# Altium PCB AcutuatorPCB.PcbDoc (part 2 of 2)
Units mm, origin at the board's own origin, x right, y up, seen from the top; angles counter-clockwise.
Board outline 80 x 80 mm, 2 copper layers (Top Layer, Bottom Layer), stack 1.57 mm thick; 63 components, 62 nets, 262 pads, 76 vias.
Unrouted connection lines stored in the file: 57.
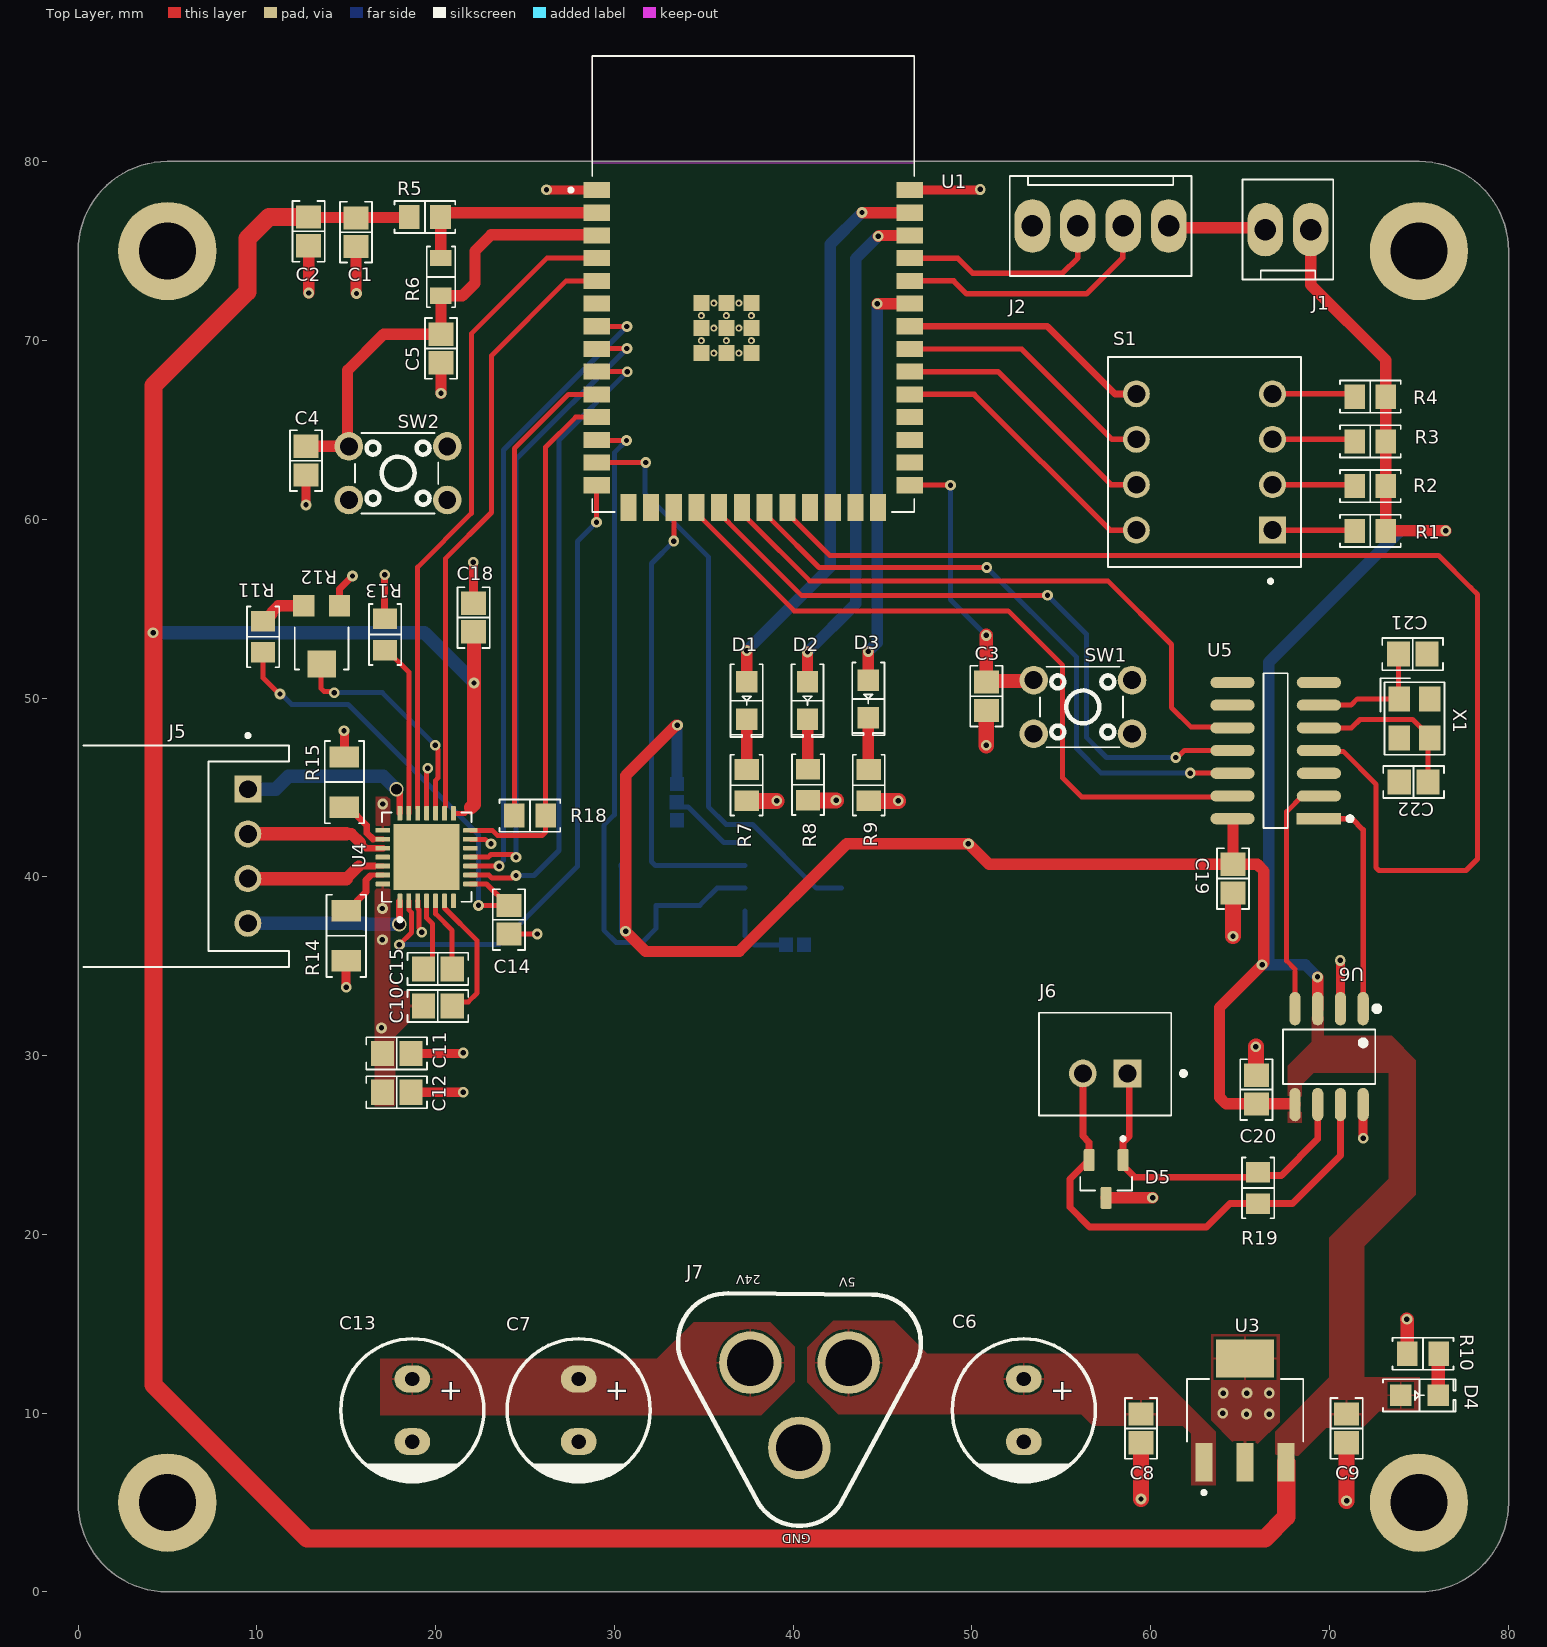
[diagram p0: Top Layer view]

## Via types
v1: diameter 0.6, hole 0.3, Top Layer to Bottom Layer, 74 vias
v2: diameter 0.8, hole 0.6, Top Layer to Bottom Layer, 2 vias

## Nets (pads, with @x,y where several pads share a name; then routed paths per layer and width w, separated by ;. In a path a pad name is that pad's centre, name@x,y a point inside that pad or via, vN(x,y) a via of type N, cw(c..) or ccw(c..) an arc to the next point about the centre after c; other vN are vias at no path point) (continued)
CAN_MOSI: (continued)
  Top Layer w0.279: U1.19 35.86,60.35 36.372,59.838 36.372,59.831 40.478,55.725 54.2,55.725 v1(54.225,55.75) ; v1(61.4,46.675) 61.487,46.675 61.872,47.06 U5.11
  Bottom Layer w0.279: v1(54.225,55.75) 56.397,53.578 56.397,47.803 57.525,46.675 v1(61.4,46.675)
CAN_SCK: U1.20 U5.10 | length 34.8
  Top Layer w0.279: U1.20 37.13,60.35 37.642,59.838 37.642,59.831 40.923,56.55 57.6,56.55 61.161,52.989 61.161,49.464 62.257,48.368 64.529,48.368 U5.10
CANH: D5.2 J6.2 R19.2 U6.7 | length 28.2
  Top Layer w0.381: J6.2 56.2,25.5 56.55,25.15 D5.2 55.482,23.092 55.482,21.518 56.582,20.418 63.118,20.418 64.425,21.725 R19.2 67.925,21.725 70.607,24.407 U6.7
CANL: D5.1 J6.1 R19.1 U6.6 | length 19.1
  Top Layer w0.381: D5.1@58.45,23.845 59.095,23.2 65.725,23.2 R19.1 66.175,23.3 67.3,23.3 69.337,25.337 U6.6 ; D5.1 58.45,25.15 58.8,25.5 58.8,28.9 J6.1
CHIP_PU: C4.2 C5.2 R6.1 SW2.4 U1.3 | length 26.1
  Top Layer w0.635: C4.2 SW2.4 15.075,64.15 15.075,68.325 17.1,70.35 C5.2 R6.1 21.5,72.5 22.2,73.2 22.2,75 23.1,75.9 28.985,75.9 U1.3
DIP_SW1: S1.1B U1.31 | length 15.8
  Top Layer w0.305: U1.31 50.12,66.98 57.71,59.39 S1.1B
DIP_SW2: S1.2B U1.32 | length 15.3
  Top Layer w0.305: U1.32 51.45,68.25 57.77,61.93 S1.2B
DIP_SW3: S1.3B U1.33 | length 14.8
  Top Layer w0.305: U1.33 52.78,69.52 57.83,64.47 S1.3B
DIP_SW4: S1.4B U1.34 | length 14.2
  Top Layer w0.381: U1.34 54.21,70.79 57.99,67.01 S1.4B
E_DIR: IC1.8 J4.3 | length 4.7
  Bottom Layer w0.279: J4.3 33.767,43.908 34.128,43.908 36.131,41.905 IC1.8
ESP_3V3: R5.1 R6.2 U1.2 | length 11.1
  Top Layer w0.635: R6.2 20.288,74.612 20.288,76.887 R5.1 20.515,77.14 U1.2
GND: C1.1 C2.1 C3.1 C4.1 C5.1 C6.2 C7.2 C8.1 C9.1 C11.1 C12.1 C13.2 C14.2 C16.1 C17.1 C18.1 C19.1 C20.1 C21.1 C22.1 D5.3 IC1.4 J2.4 J3.2 J4.2 J7.2 R7.1 R8.1 R9.1 R10.1 R12.1 R13.1 R14.1 R15.1 SW1.1 SW2.1 U1.1 U1.40 U1.41_1 U1.41_2 U1.41_3 U1.41_4 U1.41_5 U1.41_6 U1.41_7 U1.41_8 U1.41_9 U3.2 U3.4 U4.3 U4.13 U4.18 U4.29 U5.7 U6.2 U6.8 X1.2 X1.4 | length 64.7
  Top Layer w0.279: U4.3 19.005,38.645 19.005,38.227 19.071,38.161 19.071,37.141 19.225,36.987 v1(19.225,36.9) ; U4.18 19.505,43.555 19.505,46.018 v1(19.562,46.075) ; U4.13 22.774,42.1 23.024,41.85 v1(23.1,41.85) ; C14.2 24.105,36.805 v1(25.689,36.805)
  Top Layer w0.381: R12.1 14.625,56.1 v1(15.35,56.825) ; v1(17.15,56.9) 17.15,54.45 R13.1
  Top Layer w0.508: v1(12.75,60.8) C4.1 ; v1(14.875,48.175) 14.9,48.175 R15.1 ; v1(15,33.825) R14.1 ; C12.1 v1(21.55,27.95) ; C11.1 21.55,30.125 v1(21.55,30.15) ; v1(22.1,57.6) 22.113,57.587 22.113,55.312 C18.1 ; v1(26.2,78.425) 26.208,78.417 29.008,78.417 U1.1 ; U1.40 50.401,78.41 50.437,78.446 v1(50.462,78.446) ; v1(70.6,35.325) 70.607,35.325 U6.2 ; v1(71.875,25.375) 71.877,25.375 U6.8
  Top Layer w0.635: v1(12.9,72.65) C2.1 ; C1.1 15.55,72.65 v1(15.575,72.625) ; v1(20.3,67.05) C5.1 ; D5.3@57.51,22.05 v1(60.1,22.05)
  Top Layer w0.762: v1(74.325,15.25) 74.35,15.225 R10.1
  Top Layer w0.889: R7.1 v1(39.075,44.25) ; R8.1 v1(42.4,44.275) ; R9.1 v1(45.875,44.25) ; v1(50.8,47.35) C3.1 ; v1(59.45,5.2) C8.1 ; v1(64.6,36.675) C19.1 ; v1(65.875,30.5) 65.875,28.9 C20.1 ; v1(70.95,5.1) C9.1
  other v1: 65.35,9.95 66.625,9.95 64.025,10 64.05,11.125 65.375,11.125 66.625,11.125
GPIO_0: C3.2 SW1.4 U1.27 | length 16.8
  Top Layer w0.279: U1.27 v1(48.8,61.9)
  Top Layer w0.762: v1(50.8,53.5) C3.2 C3.2@50.825,50.925 ; C3.2@50.85,50.95 53.4,50.95 SW1.4
  Bottom Layer w0.279: v1(48.8,61.9) 48.8,55.5 v1(50.8,53.5)
NetC15_1: C15.1 U4.4 | length 4.2
  Top Layer w0.279: C15.1 19.835,35.36 19.835,37.365 19.5,37.7 U4.4
NetC15_2: C15.2 U4.5 | length 4.2
  Top Layer w0.279: U4.5 20,37.925 20.925,37 C15.2
NetD1_2: D1.2 R7.2 | length 2.8
  Top Layer w0.635: R7.2@37.4,45.95 D1.2
NetD2_2: D2.2 R8.2 | length 2.8
  Top Layer w0.635: D2.2 40.812,48.787 40.812,46.038 R8.2
NetD3_2: D3.2 R9.2 | length 2.8
  Top Layer w0.635: R9.2@44.2,46.075 D3.2
NetD4_2: D4.2 R10.2 | length 2.3
  Top Layer w0.762: D4.2 76.088,11.013 76.088,13.313 R10.2
NetIC1_5: IC1.5 J3.1 | length 3.9
  Bottom Layer w0.279: IC1.5 37.3,36.7 37.825,36.175 39.567,36.175 J3.1
NetJ1_1: J1.1 J2.1 | length 5.5
  Top Layer w0.305: J2.1 J2.1@61.1,76.3 ; J1.1@66.3,76.3 J1.1
  Top Layer w0.635: J2.1@61.1,76.3 J1.1@66.3,76.3
NetR1_1: R1.1 S1.1A | length 4.6
  Top Layer w0.305: S1.1A 71.36,59.39 R1.1
NetR2_1: R2.1 S1.2A | length 4.6
  Top Layer w0.305: S1.2A 71.32,61.93 R2.1
NetR3_1: R3.1 S1.3A | length 4.6
  Top Layer w0.305: S1.3A 71.28,64.47 R3.1
NetR4_1: R4.1 S1.4A | length 4.7
  Top Layer w0.305: S1.4A 71.24,67.01 R4.1
NetR11_1: R11.1 R12.3 | length 2.7
  Top Layer w0.635: R11.1 10.45,54.3 10.828,54.678 10.828,54.778 11.2,55.15 R12.3
NetR12_2: R12.2 U4.17 | length 12.7
  Top Layer w0.279: R12.2 13.6,51.875 13.6,50.525 13.764,50.361 14.264,50.361 v1(14.325,50.3) ; v1(19.975,47.35) 19.975,47.263 20.129,47.11 20.129,45.527 20,45.398 U4.17@20,43.815
  Bottom Layer w0.279: v1(14.325,50.3) 17.025,50.3 v1(19.975,47.35)
NetR13_2: R13.2 U4.20 | length 9.7
  Top Layer w0.279: R13.2 17.275,52.675 18.5,51.45 U4.20
NetR14_2: R14.2 U4.27 | length 3.4
  Top Layer w0.279: 16.323,40.053 16.371,40.1 U4.27
  Top Layer w0.381: R14.2 15.225,38.1 15.635,38.51 15.635,38.685 16.1,39.15 16.1,39.829 16.323,40.053
NetR15_2: R15.2 U4.23 | length 3.1
  Top Layer w0.279: 16.495,42.105 17.045,42.105 U4.23
  Top Layer w0.381: R15.2 15.125,43.9 16.149,42.876 16.149,42.451 16.495,42.105
OA1: J5.2 U4.24 | length 7.9
  Top Layer w0.381: 15.8,41.9 16.1,41.6 U4.24
  Top Layer w0.635: 15,42.4 15.3,42.4 15.8,41.9
  Top Layer w0.762: J5.2 15,42.4
OA2: J5.1 U4.21 | length 10.3
  Top Layer w0.381: v2(17.81,44.903) 17.81,44.789 18,44.6 U4.21
  Bottom Layer w0.762: J5.1 9.501,44.901 11.051,44.901 11.775,45.625 17.078,45.625 17.8,44.903 v2(17.81,44.903)
OB1: J5.3 U4.26 | length 7.8
  Top Layer w0.279: 16.6,40.608 16.603,40.605 17.045,40.605 U4.26
  Top Layer w0.381: 15.7,40.6 15.708,40.608 16.6,40.608
  Top Layer w0.635: 15,39.9 15.7,40.6
  Top Layer w0.762: J5.3 15,39.9
OB2: J5.4 U4.1 | length 9.8
  Top Layer w0.381: v2(17.975,37.35) 17.988,37.362 17.988,38.638 U4.1
  Bottom Layer w0.762: J5.4 16.051,37.4 16.101,37.35 v2(17.975,37.35)
OSC1: C21.2 U5.6 X1.1 | length 7.2
  Top Layer w0.279: U5.6 71.2,49.6 71.55,49.95 X1.1 73.85,50 C21.2
OSC2: C22.2 U5.5 X1.3 | length 9.4
  Top Layer w0.279: U5.5 71.23,48.33 71.7,48.8 74.65,48.8 75.6,47.85 X1.3 75.5,47.65 C22.2
PD_UART: R18.1 U1.11 U4.14 | length 29.5
  Top Layer w0.279: U4.14 23.175,42.6 23.475,42.3 25.95,42.3 26.145,42.495 26.145,43.42 R18.1 26.15,64.025 27.835,65.71 U1.11
RXD: U5.2 U6.4 | length 13.4
  Top Layer w0.279: U6.4 68.067,34.833 67.6,35.3 67.6,43.646 68.474,44.52 U5.2
STATUS_LED1: D1.1 U1.39 | length 31.6
  Top Layer w0.635: D1.1 37.4,52.625 v1(37.4,52.65) ; v1(43.85,77.15) 43.86,77.14 U1.39
  Bottom Layer w0.635: v1(37.4,52.65) 42.075,57.325 42.075,75.375 v1(43.85,77.15)
STATUS_LED2: D2.1 U1.38 | length 28.3
  Top Layer w0.635: D2.1 v1(40.8,52.575) ; v1(44.75,75.825) 44.795,75.87 U1.38
  Bottom Layer w0.635: v1(40.8,52.575) 43.5,55.275 43.5,74.575 v1(44.75,75.825)
STATUS_LED3: D3.1 U1.35 | length 23.1
  Top Layer w0.635: D3.1 v1(44.2,52.6) ; v1(44.7,72.05) 44.71,72.06 U1.35
  Bottom Layer w0.635: v1(44.2,52.6) 44.7,53.1 v1(44.7,72.05)
TMC2209_DIAG: U1.8 U4.11 | length 35.4
  Top Layer w0.279: U4.11 22.95,41.1 23.1,41.25 24.263,41.25 24.413,41.1 v1(24.5,41.1) ; U1.8 29.045,69.55 v1(30.7,69.55)
  Bottom Layer w0.279: v1(24.5,41.1) 24.5,63.35 v1(30.7,69.55)
TMC2209_DIR: U1.4 U4.19 | length 36.6
  Top Layer w0.279: U4.19@18.995,43.815 18.995,57.32 22,60.325 22,70.375 26.225,74.6 U1.4
TMC2209_ENN: U1.14 U4.2 | length 36.3
  Top Layer w0.279: v1(17.975,36.2) 18.658,36.883 18.658,37.135 18.665,37.141 18.665,37.993 18.505,38.153 18.505,38.645 U4.2 ; v1(29,59.825) 29,61.885 U1.14
  Bottom Layer w0.279: v1(17.975,36.2) 23.55,36.2 27.925,40.575 27.925,58.75 v1(29,59.825)
TMC2209_MS1: U1.9 U4.9 | length 35.7
  Top Layer w0.279: U4.9 22.975,40.1 23.15,39.925 24.263,39.925 24.413,40.075 v1(24.5,40.075) ; U1.9 v1(30.725,68.25)
  Bottom Layer w0.279: v1(24.5,40.075) 25.5,40.075 26.9,41.475 26.9,64.425 v1(30.725,68.25)
TMC2209_MS2: U1.7 U4.10 | length 36.4
  Top Layer w0.279: U4.10 v1(23.55,40.6) ; U1.7 29.03,70.775 v1(30.7,70.775)
  Bottom Layer w0.279: v1(23.55,40.6) 23.55,40.674 23.8,40.924 23.8,63.875 v1(30.7,70.775)
TMC2209_STEP: U1.5 U4.16 | length 34.3
  Top Layer w0.279: U4.16 20.505,43.555 20.505,43.884 20.542,43.921 20.542,57.792 23.125,60.375 23.125,69.15 27.305,73.33 U1.5
TMC2209_TXD: R18.2 U1.10 | length 26.4
  Top Layer w0.279: R18.2 24.4,63.95 27.43,66.98 U1.10
TXD: U5.1 U6.1 | length 12.7
  Top Layer w0.305: U5.1 71.25,43.25 71.877,42.623 U6.1
U0RXD: J2.2 U1.36 | length 14.8
  Top Layer w0.305: U1.36 48.97,73.33 49.7,72.6 56.4,72.6 58.421,74.621 58.421,76.361 J2.2
U0TXD: J2.3 U1.37 | length 11.9
  Top Layer w0.305: U1.37 49.2,74.6 50.038,73.762 55.062,73.762 55.92,74.62 J2.3
VCC_3V3: C1.2 C2.2 C9.2 C16.2 C17.2 C18.2 C19.2 C20.2 D4.1 IC1.1 IC1.2 J1.2 J4.1 R1.2 R2.2 R3.2 R4.2 R5.2 R16.2 R17.2 U3.3 U4.15 U5.14 U6.3 U6.5 | length 313.4
  Top Layer w0.279: U4.15 21.65,43.55 21.975,43.875
  Top Layer w0.635: C2.2 12.925,76.875 15.525,76.875 C1.2 15.575,76.875 18.5,76.875 R5.2 ; v1(33.525,48.475) 33.45,48.475 30.625,45.65 v1(30.625,36.95) 31.75,35.825 36.975,35.825 43,41.85 v1(49.8,41.85) 50.95,40.7 C19.2 ; U5.14 64.594,43.25 64.6,43.244 C19.2 ; U6.5 68.067,27.297 68.064,27.3 C20.2 64.212,27.3 63.84,27.672 63.84,32.69 v1(66.225,35.075) 66.325,35.175 66.325,40.328 65.953,40.7 C19.2 ; J1.2 68.94,73.115 73.15,68.905 R4.2 R3.2 R2.2 R1.2 v1(76.5,59.35) ; v1(69.325,34.4) 69.337,34.388 U6.3
  Top Layer w0.762: 21.975,43.875 22.146,44.046 v1(22.146,50.836) 22.146,53.679 C18.2
  Top Layer w1.016: C2.2 10.675,76.9 9.475,75.7 9.475,72.725 4.225,67.475 4.225,11.575 12.8,3 66.375,3 67.575,4.2 U3.3
  Bottom Layer w0.635: R17.2 30.563,40.612 30.563,38.412 R16.2 30.575,37 v1(30.625,36.95) ; J4.1 33.5,48.45 v1(33.525,48.475) ; v1(69.325,34.4) 68.65,35.075 v1(66.225,35.075) 66.6,35.45 66.6,52 73.95,59.35 v1(76.5,59.35)
  Bottom Layer w0.762: v1(4.2,53.65) 19.375,53.65 22.146,50.879 v1(22.146,50.836)
VCP: C10.1 U4.6 | length 7.6
  Top Layer w0.279: U4.6 20.5,38.253 22.325,36.428 22.325,33.5 21.83,33.005 21.155,33.005 C10.1
VS: C7.1 C10.2 C11.2 C12.2 C13.1 J7.3 U4.22 U4.28
  other v1: 16.975,31.55 17.025,36.475 17.025,38.225 17.05,44.075
pads on no net: SW1.2 SW1.3 SW2.2 SW2.3 U1.6 U1.15 U1.16 U1.23 U1.24 U1.25 U1.26 U1.28 U1.29 U1.30 U1.41_10 U1.41_11 U1.41_12 U1.41_13 U1.41_14 U1.41_15 U1.41_16 U1.41_17 U1.41_18 U1.41_19 U1.41_20 U1.41_21 U4.7 U4.12 U4.25 U5.3 U5.8 U5.9

## Polygon pours and split planes (outlines as drawn)
VCC_3V3 on Top Layer "NONET_L-01_P-001" (solid, pour order 18): 69.975,11.625 69.975,19.8 73.3,23.125 73.3,29.175 74.7,29.175 74.825,29.05 74.825,22.225 71.95,19.35 71.95,17.95 71.95,11.625
VCC_3V3 on Top Layer "NONET_L-01_P-001" (solid, pour order 17): 67.65,26.25 67.65,29.425 69,30.775 69,34.725 69.675,34.725 69.675,31.1 73.475,31.1 74.825,29.75 74.825,29.05 69.125,29.05 68.45,28.375 68.45,26.25
GND on Top Layer "NONET_L-01_P-001" (solid, pour order 15): 65.875,5.975 65.875,8.175 67.2,9.5 67.2,14.425 63.375,14.425 63.375,9.6 64.675,8.3 64.675,5.975
VS on Top Layer "NONET_L-01_P-001" (solid, pour order 10): 17.45,39.8 16.6,39.8 16.6,27.175 17.675,27.175 17.75,27.25 17.75,31.075 18.625,31.95 19.975,31.95 19.975,33.6 18.225,33.6 17.45,34.375
VS on Top Layer "NONET_L-01_P-001" (solid, pour order 11): 17.45,42.475 17.45,44.325 17.3,44.475 16.66,44.475 16.66,42.475
VCC_3V3 on Top Layer "NONET_L-01_P-001" (solid, pour order 6): 66.95,6.1 66.95,8.975 69.975,12 75.05,12 75.05,10.15 75,10.1 72.775,10.1 71.85,9.175 69.8,9.175 68.225,7.6 68.225,6.1
+5 on Top Layer "NONET_L-01_P-001" (solid, pour order 5): 40.775,11.725 40.775,13.7 42.25,15.175 45.647,15.175 47.497,13.325 48.075,13.325 59.275,13.325 63.625,8.975 63.625,5.975 62.275,5.975 62.25,5.95 62.25,8.85 61.8,9.3 56.75,9.3 56.1,9.95 42.525,9.95
VS on Top Layer "NONET_L-01_P-001" (solid, pour order 1): 34.425,15.1 38.725,15.1 40.1,13.725 40.1,11.75 38.225,9.875 16.9,9.875 16.9,13.05 32.375,13.05
VCC_3V3 on Bottom Layer "NONET_L-01_P-001" (solid, pour order 14): 50.6,41.05 44.55,41.05 43.625,40.125 41.75,40.125 41.75,42.35 42.037,42.637 50.6,42.685
VS on Bottom Layer "NONET_L-01_P-001" (solid, pour order 12): 17.45,37.875 16.6,37.875 16.6,37.925 16.65,44.475 17.3,44.475 17.45,44.325

## Silkscreen, mask and mechanical layers (free items; w line width, h text height)
Mechanical 1:
  lines w0.013: 0.006,5.006 ccw(c5.006,5.006) 5.006,0.006 ; 0.006,75.006 cw(c5.006,75.006) 5.006,80.006 ; 75.006,0.006 ccw(c75.006,5.006) 80.006,5.006

## Text inside footprints (layer, text, board x,y; h text height)
C6: Top Overlay "+" at 54.15,11.91 h2 r270
C7: Top Overlay "+" at 29.25,11.91 h2 r270
C13: Top Overlay "+" at 19.95,11.91 h2 r270
J5: Mechanical 13 "PCB Edge" at 0.5,34.1 h0.81 r270
J7: Top Overlay "5V" at 43.51,17.582 h0.51 r180; Top Overlay "24V" at 38.176,17.709 h0.51 r180; Top Overlay "GND" at 40.97,3.231 h0.51 r180; Bottom Overlay "24V" at 36.794,15.494 h0.51 r180; Bottom Overlay "5V" at 42.763,15.367 h0.51 r180; Bottom Overlay "GND" at 39.715,5.842 h0.51 r180
U1: Mechanical 13 "ANTENNA" at 33.265,82.65 h1.27